# EAGLE board lv2-2m (EAGLE 4.09)
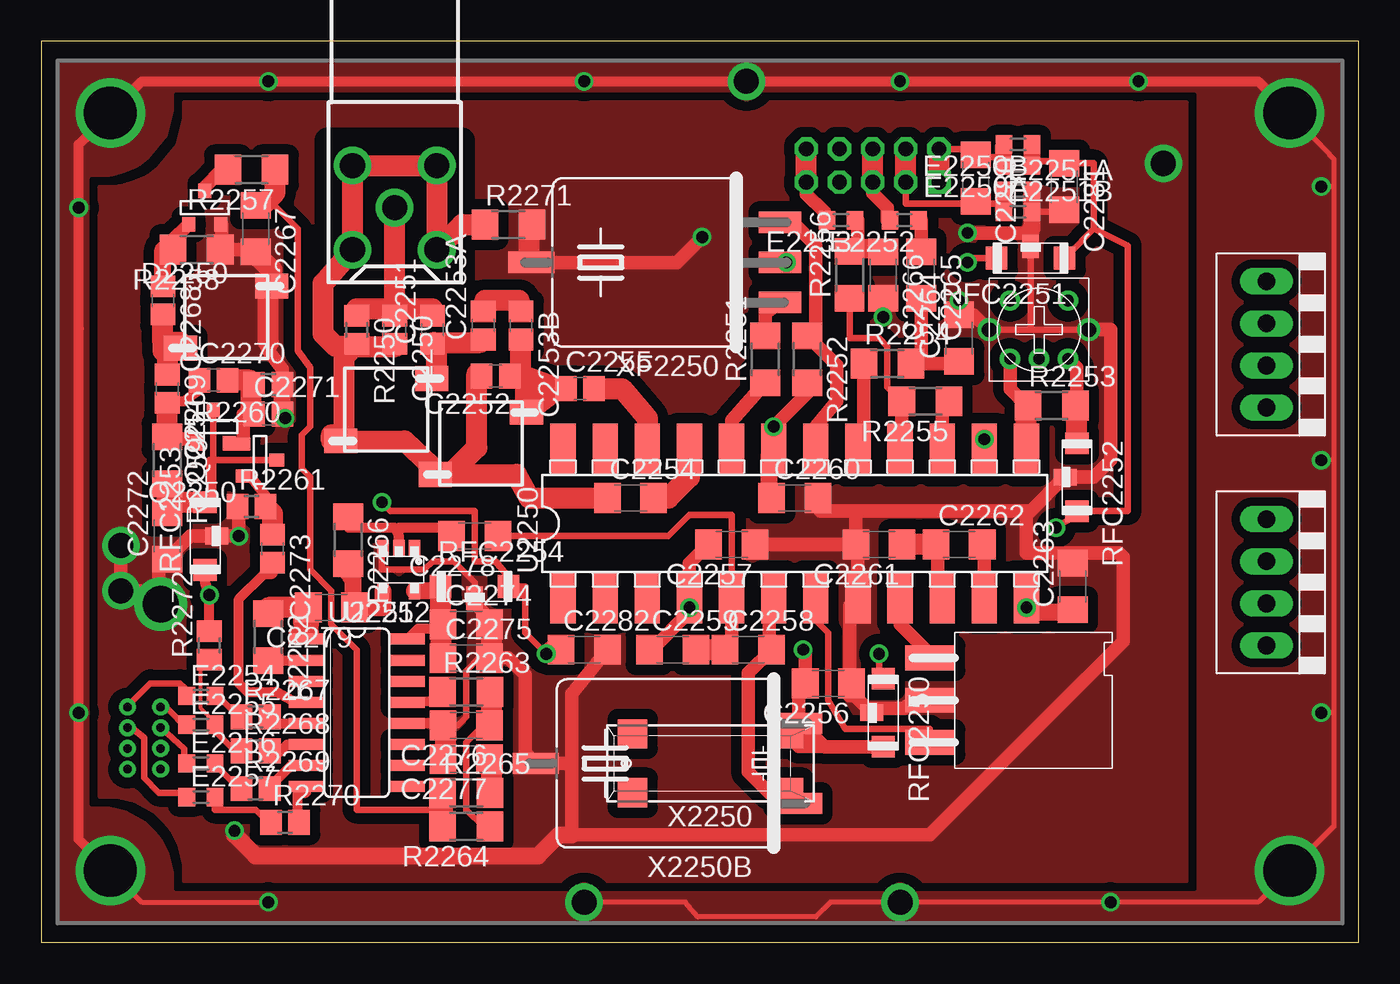
[diagram p0: board, top side]
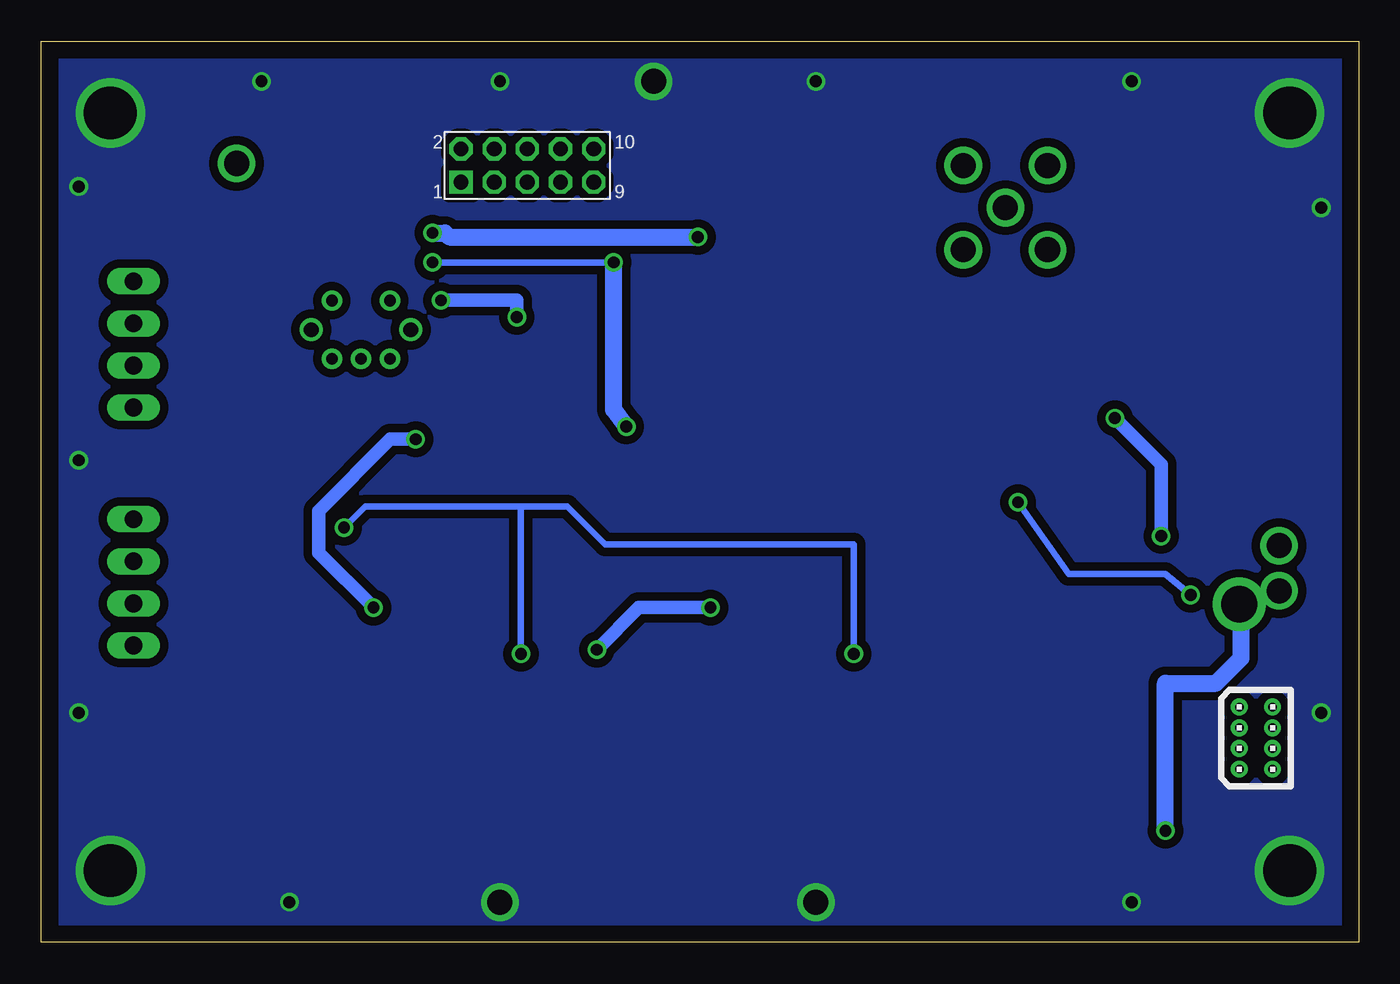
[diagram p1: board, bottom side, seen from below]

Size 79.43 x 54.35 mm. Coordinates in mm from the lower left corner, seen from the top.
Outline: 0,0 79.43,0 79.43,54.35 0,54.35 0,0
Copper layers used: Top, Bottom
tRestrict: 3 lines

## Footprints (pad centres in the part's own frame; a part is rotated, then mirrored left to right if it is on the bottom)
C0805 = smd 1.3 x 1.5: 1 -0.85,0; 2 0.85,0
C1206 = smd 1.6 x 1.8: 1 -1.4,0; 2 1.4,0
PHEONIX-2.54-PITCH-EUROBLOCK = drill 1.067 long: 1 0,3.81; 2 0,1.27; 3 0,-1.27; 4 0,-3.81
2MM-2X5-HEADER = drill 0.889 pad 1.321 square: 1 -4,-1 | drill 0.889 pad 1.321 octagon: 2 -4,1; 3 -2,-1; 4 -2,1; 5 0,-1; 6 0,1; 7 2,-1; 8 2,1; 9 4,-1; 10 4,1
FARKA_MALE_PCB = drill 1.511 round: RF+ 0,0; RF-@1 2.54,2.54; RF-@2 -2.54,2.54; RF-@3 -2.54,-2.54; RF-@4 2.54,-2.54
JST-08P-JED = drill 0.508 pad 1.016 round: 1 -1.875,1; 2 -1.875,-1; 3 -0.625,1; 4 -0.625,-1; 5 0.625,1; 6 0.625,-1; 7 1.875,1; 8 1.875,-1
SOT-23 = smd 0.787 x 0.889: 1 0.025,-1.016; 2 -0.94,1.016; 3 0.991,1.016
R0603 = smd 1 x 1.1: 1 -0.85,0; 2 0.85,0
TOKO_MC152_UNSHLD = smd 1.5 x 2: 1 -1.875,2.75; 2 1.875,-2.75
TOKO_5P_CAN = drill 0.711 round: 1 -1.75,-1.75; 2 -1.75,0; 3 -1.75,1.75; 4 1.75,1.75; 6 1.75,-1.75 | drill 0.889 round: SHIELD@1 0,3; SHIELD@2 0,-3
R0805 = smd 1.3 x 1.5: 1 -0.85,0; 2 0.85,0
R1206 = smd 1.6 x 1.803: 1 -1.422,0; 2 1.422,0
EXC-CET = smd 1.3 x 1.4: 1 -2.05,0; 2 2.05,0 | smd 1 x 1.4: C 0,-0.7
DIL24-SMT = smd 1.524 x 3.175: 1 -13.97,-4.445; 2 -11.43,-4.445; 3 -8.89,-4.445; 4 -6.35,-4.445; 5 -3.81,-4.445; 6 -1.27,-4.445; 7 1.27,-4.445; 8 3.81,-4.445; 9 6.35,-4.445; 10 8.89,-4.445; 11 11.43,-4.445; 12 13.97,-4.445; 13 13.97,4.445; 14 11.43,4.445; 15 8.89,4.445; 16 6.35,4.445; 17 3.81,4.445; 18 1.27,4.445; 19 -1.27,4.445; 20 -3.81,4.445; 21 -6.35,4.445; 22 -8.89,4.445; 23 -11.43,4.445; 24 -13.97,4.445
SO16 = smd 0.66 x 2.032: 1 -4.445,-3.073; 2 -3.175,-3.073; 3 -1.905,-3.073; 4 -0.635,-3.073; 5 0.635,-3.073; 6 1.905,-3.073; 7 3.175,-3.073; 8 4.445,-3.073; 9 4.445,3.073; 10 3.175,3.073; 11 1.905,3.073; 12 0.635,3.073; 13 -0.635,3.073; 14 -1.905,3.073; 15 -3.175,3.073; 16 -4.445,3.073
SOT23-5 = smd 0.7 x 1: 1 -0.95,-1.3; 2 0,-1.3; 3 0.95,-1.3; 4 0.95,1.3; 5 -0.95,1.3
MM39SL = smd 1.778 x 1.778: 1 -4.699,-1.778; 2 4.699,-1.778; 3 4.699,1.778; 4 -4.699,1.778
HC49GW = smd 1.27 x 2.54: 1 -2.413,-8.001; 2 2.413,-8.001 | smd 1.27 x 2.794: 3 0,8.001
HC49U-SMT = smd 1.27 x 2.54: 1 -2.413,-8.001; 2 2.413,-8.001; 3 0,-8.001 | smd 1.27 x 2.794: 4 0,7.001
CERAMIC_FILTER_SIDEWAYS_SMT = smd 1.5 x 3: 1 -2.54,-1.5; 2 0,-1.5; 3 2.54,-1.5

## Placement (x,y rotation side)
C2250  82pF  [C0805]  21.3,36.95 270 top
C2251  27pF  [C0805]  23.58,36.95 90 top
C2252  15pF  [C0805]  27.39,34.16 180 top
C2253A  5pF  [C0805]  26.63,37.21 90 top
C2253B  2pF  [C0805]  28.92,37.21 270 top
C2254  0.1  [C1206]  35.52,26.79 0 top
C2255  100pF  [C0805]  32.47,33.4 0 top
C2256  10  [C1206]  47.46,15.62 180 top
C2257  0.1  [C1206]  41.62,24 180 top
C2258  51pF  [C1206]  42.63,17.65 0 top
C2259  120pF  [C1206]  38.06,17.65 0 top
C2260  0.1  [C1206]  45.43,26.79 0 top
C2261  0.1  [C1206]  50.51,24 180 top
C2262  0.1  [C1206]  55.33,24 0 top
C2263  0.1  [C1206]  62.19,21.46 90 top
C2264  0.1  [C1206]  55.33,36.44 90 top
C2265  0.33  [C1206]  53.05,40.25 270 top
C2266  0.1  [C1206]  50.76,40.25 270 top
C2267  0.047  [C1206]  12.92,43.05 270 top
C2268  18pF  [C0805]  7.33,38.73 270 top
C2269  100pF  [C0805]  7.58,33.4 270 top
C2270  20pF  [C0805]  10.38,33.9 0 top
C2271  10pF  [C0805]  13.68,31.87 0 top
C2272  0.1  [C1206]  7.58,24.51 90 top
C2273  100pF  [C0805]  13.93,23.74 270 top
C2274  10  [C1206]  25.62,19.17 0 top
C2275  0.1  [C1206]  25.62,17.14 0 top
C2276  0.047  [C1206]  25.62,13.08 180 top
C2277  0.33  [C1206]  25.62,11.04 180 top
C2278  0.01  [C1206]  26.12,24.51 180 top
C2279  0.01  [C1206]  17.49,20.19 180 top
C2280  0.1  [C1206]  56.35,46.1 270 top
C2281  0.1  [C1206]  61.68,45.59 270 top
C2282  0.1  [C1206]  32.73,17.65 0 top
CF2100  CONN_EUROBLOCK_PHEONIX2.54  [PHEONIX-2.54-PITCH-EUROBLOCK]  73.88,36.06 180 top
CF2101  CONN_EUROBLOCK_PHEONIX2.54  [PHEONIX-2.54-PITCH-EUROBLOCK]  73.88,21.71 180 top
CF2251  2mm-2x5 receptacle  [2MM-2X5-HEADER]  50.13,46.86 0 bottom
CM2250  CONN_SMB_MALE-FARKA  [FARKA_MALE_PCB]  21.3,44.32 90 top
CM2251  Digital Control  [JST-08P-JED]  6.18,12.31 90 bottom
D2250  ZDC833A  [SOT-23]  9.87,44.32 180 top
E2250A  [R0603]  58.89,46.86 180 top
E2250B  [R0603]  58.89,48.13 180 top
E2251A  [R0603]  58.89,45.33 0 top
E2251B  [R0603]  58.89,44.06 0 top
E2252  [R0603]  52.03,43.56 180 top
E2253  [R0603]  48.22,43.56 180 top
E2254  [R0603]  9.61,14.85 0 top
E2255  [R0603]  9.61,13.13 0 top
E2256  [R0603]  9.61,10.79 0 top
E2257  [R0603]  9.61,8.76 0 top
LV2250  36-46nH  [TOKO_MC152_UNSHLD]  20.79,32.13 270 top
LV2251  36-46nH  [TOKO_MC152_UNSHLD]  26.51,30.09 270 top
LV2252  455kHz  [TOKO_5P_CAN]  60.16,36.95 90 top
LV2253  32nH  [TOKO_MC152_UNSHLD]  11.14,37.71 90 top
Q2250  H10  [SOT-23]  10.38,31.11 180 top
Q2251  H10  [SOT-23]  13.17,29.08 90 top
R2250  1k  [R0805]  19.01,36.95 270 top
R2251  1k  [R1206]  43.65,35.17 90 top
R2252  1.8k  [R1206]  46.19,35.17 270 top
R2253  47k  [R1206]  60.92,32.38 0 top
R2254  1k  [R1206]  51.02,34.92 0 top
R2255  0  [R1206]  53.3,32.63 180 top
R2256  4.7k  [R1206]  48.73,40.25 90 top
R2257  20k  [R1206]  12.66,46.6 180 top
R2258  10k  [R1206]  9.36,41.78 180 top
R2259  20k  [R1206]  7.58,29.08 270 top
R2260  470  [R0805]  13.68,33.65 180 top
R2261  680  [R0805]  12.66,26.28 0 top
R2262  4.7M  [R1206]  13.68,18.41 270 top
R2263  2k  [R1206]  25.62,15.11 0 top
R2264  2k  [R1206]  25.62,6.98 180 top
R2265  10k  [R1206]  25.62,9.01 0 top
R2266  1M  [R1206]  18.5,24.25 270 top
R2267  1k  [R0805]  12.92,13.58 0 top
R2268  1k  [R0805]  12.92,11.55 0 top
R2269  1k  [R0805]  12.92,9.27 0 top
R2270  100  [R0805]  14.69,7.23 0 top
R2271  1k  [R1206]  28.16,43.3 0 top
R2272  47k  [R0805]  10.12,17.9 90 top
RFC2250  [EXC-CET]  50.76,13.84 270 top
RFC2251  [EXC-CET]  59.65,41.27 180 top
RFC2252  [EXC-CET]  62.45,28.06 270 top
RFC2253  [EXC-CET]  9.87,24.51 90 top
RFC2254  [EXC-CET]  26.12,21.46 0 top
U2250  [DIL24-SMT]  45.43,25.27 0 top
U2251  [SO16]  19.01,13.84 270 top
U2252  74HC1G04  [SOT23-5]  21.55,22.47 180 top
X2250  10.240MHz  [MM39SL]  40.35,10.79 180 top
X2250B  [HC49GW]  37.81,10.79 90 top
XF2250  10.7MHz  [HC49U-SMT]  36.54,41.02 90 top
XF2251  455kHz  [CERAMIC_FILTER_SIDEWAYS_SMT]  55.08,14.6 270 top

## Library data of the parts
C2250-C2252 C2253A C2253B C2254-C2282 R2250-R2272 = rcl
CF2100 CF2101 CF2251 CM2250 CM2251 E2250A E2250B E2251A E2251B E2252-E2257 LV2250-LV2253 RFC2250-RFC2254 U2250-U2252 XF2250 XF2251 = psas_eagle_library
D2250 = zetex
Q2250 Q2251 = custom-zetex
X2250 X2250B = crystal

## Nets
5VOLTS: C2281.1 C2282.1 E2250A.1 E2250B.1 R2272.2 RFC2250.1 RFC2251.1 RFC2252.2 RFC2253.1 RFC2254.2
AF_OUT: R2254.1 U2250.17
AUDIO_AC: C2265.1 E2252.1
AUDIO_FILT: C2264.1 C2265.2 R2254.2
AUDIO_OUTPUT: CF2251.5 CF2251.6 E2252.2
BPF1_IN: R2251.2 XF2250.1
BPF1_OUT: R2252.1 U2250.18 XF2250.2
BYP_1: C2261.1 C2262.1 U2250.10
BYP_2: C2262.2 U2250.11
C2253W: C2253A.2 C2253B.1
CLOCK: CM2251.5 E2256.1
CLOLCK_FB: E2257.2 R2270.1
COMMON_K: D2250.1 R2257.2
DATA_IN: CM2251.8 E2254.1
DATA_IN_FB: E2254.2 R2267.1
DATA_OUT: CM2251.6 E2257.1
DATA_OUT_FB: E2256.2 R2269.1
DEMOD: LV2252.3 R2253.1 U2250.13
ENABLE\: CM2251.7 E2255.1
ENABLE\_FB: E2255.2 R2268.1 R2272.1
GND: C2256.1 C2257.1 C2260.2 C2261.2 C2263.2 C2264.2 C2266.2 C2267.2 C2271.2 C2272.1 C2274.2 C2275.2 C2276.2 C2277.2 C2281.2 C2282.2 D2250.2 E2251A.2 E2251B.2 LV2252.SHIELD@1 LV2252.SHIELD@2 LV2253.2 R2258.1 R2260.1 R2261.1 R2271.2 RFC2250.C RFC2251.C RFC2252.C RFC2253.C RFC2254.C U2250.8 U2251.12 U2252.3 X2250B.3 XF2250.4 XF2251.2
IF_IN: U2250.9 XF2251.1
INVERTER_IN: C2278.2 R2266.1 U2252.2
INVERTER_OUT: C2279.1 R2266.2 U2252.4
LO1_IN: C2258.2 U2250.6 X2250.4 X2250B.1
LO1_OUT: C2258.1 C2259.2 C2278.1 U2250.5
MX1_I1: C2255.2 U2250.22
MX1_I2: C2254.2 U2250.21
MX1_OUT: R2251.1 U2250.20
MX2_OUT: U2250.7 XF2251.3
NEG_IN: C2280.2 CF2251.3 CF2251.4 E2251A.1 E2251B.1
OPAMP_FEEDBACK: R2255.1 U2250.15
OPAMP_OUTPUT: R2255.2 R2256.1 U2250.16
PHI-A: R2263.1 U2251.13
PLL_CLOCK: R2269.2 U2251.7
PLL_DATA_IN: R2267.2 U2251.5
PLL_DATA_OUT: R2270.2 U2251.8
PLL_ENB\: R2268.2 U2251.6
PLL_FILT1: C2276.1 R2263.2 R2264.1
PLL_FILT2: C2277.1 R2265.2
PLL_OSC_IN: C2279.2 R2262.1 U2251.1
PLL_OSC_OUT: R2262.2 U2251.2
PLL_RF_IN: C2273.2 U2251.4
POS_IN: C2280.1 CF2251.1 CF2251.2 E2250A.2 E2250B.2
Q2250_B: C2269.2 C2270.1 Q2250.3 R2259.1
Q2250_E: C2270.2 C2271.1 Q2250.2 Q2251.3 R2260.2
Q2251_E: C2273.1 Q2251.2 R2261.2
RF+: C2250.1 C2251.2 CM2250.RF+ R2250.1
RF-: C2250.2 C2252.2 C2254.1 CM2250.RF-@1 CM2250.RF-@2 CM2250.RF-@3 CM2250.RF-@4 LV2250.2 LV2251.2 R2250.2 R2271.1
RSSI: CF2251.9 CF2251.10 E2253.2
RSSI_FILT: C2266.1 E2253.1 R2256.2
RSSI_RAW: C2263.1 U2250.12 U2250.14
T1: C2251.1 C2253A.1 LV2250.1
T2: C2252.1 C2253B.2 C2255.1 LV2251.1
T3: C2268.2 C2269.1 LV2253.1
TUNING_VOLTAGE: C2267.1 R2257.1 R2264.2 R2265.1
VARICAP_ANODE: C2268.1 D2250.3 R2258.2
VCC_1: C2256.2 C2257.2 C2259.1 RFC2250.2 U2250.4 X2250.1 X2250B.2
VCC_2: C2260.1 R2252.2 RFC2251.2 U2250.19 XF2250.3
VCC_3: LV2252.1 R2253.2 RFC2252.1
VCC_4: C2272.2 Q2250.1 Q2251.1 R2259.2 RFC2253.2
VCC_5: C2274.1 C2275.1 RFC2254.1 U2251.16 U2252.5

## Tracks (layer width: path | path; a pad name or v marks a point on that pad's centre or on a via)
5VOLTS  (via drill 0.71)
  Top 0.406: E2250A.1 59.74,47.11 61.68,47.11 C2281.1 63.46,46.99 63.46,43.05 | 61.68,41.52 RFC2251.1 61.94,41.52 63.46,43.05 | 63.46,43.05 65.49,42.03 65.49,26.01 RFC2252.2 62.45,25.78 v61.18,25.01 | 28.68,21.46 28.66,21.46 | 28.68,21.46 RFC2254.2 28.41,21.71 27.39,22.98 26.12,22.98 26.12,26.03 21.04,26.03 v20.54,26.54 | 29.17,21.46 29.17,18.66 v30.44,17.39 | 28.68,21.46 29.17,21.46 | 28.92,20.95 28.92,21.2 29.17,21.46 | RFC2253.1 9.87,22.47 | RFC2250.1 50.51,16.14 v50.51,17.39
  Top 0.61: RFC2253.1 9.87,21.71 v10.12,20.95 R2272.2
  Top 1.016: E2250A.1 E2250B.1 | v30.44,17.39 30.7,17.65 C2282.1
  Bottom 0.406: 50.51,26.28 47.71,26.28 45.43,24 30.44,24 v30.44,17.39 | 50.51,26.28 59.91,26.28 v61.18,25.01 | v20.54,26.54 17.49,22.22 11.65,22.22 v10.12,20.95 | 50.51,26.28 v50.51,17.39
AF_OUT
  Top 0.813: U2250.17 49.24,29.84 49.59,30.2 R2254.1
AUDIO_AC
  Top 0.813: 52.79,43.56 E2252.1 53.05,43.56 C2265.1
AUDIO_FILT
  Top 0.813: C2264.1 55.21,34.92 R2254.2 52.44,35.17 | 52.44,35.17 52.29,35.17 | C2265.2 53.05,35.17 52.44,35.17
AUDIO_OUTPUT
  Top 0.813: 50.13,45.84 50.13,45.21 51.02,44.32 51.02,43.56 E2252.2
  Top 1.27: CF2251.5 50.13,45.84 CF2251.6
BPF1_IN
  Top 0.813: XF2250.1 43.65,37.97 R2251.2
BPF1_OUT
  Top 0.813: XF2250.2 45.3,43.43 46.7,42.03 46.7,36.95 46.44,36.7 R2252.1 47.97,34.82 47.97,32.63 46.7,31.11 U2250.18 46.7,29.59
BYP_1
  Top 0.813: C2262.1 54.06,24 54.06,20.82 U2250.10
  Top 1.27: C2262.1 C2261.1
BYP_2
  Top 0.813: C2262.2 56.86,24 U2250.11
C2253W
  Top 1.27: C2253B.1 28.79,38.73 26.76,38.73 C2253A.2
CHASSIS  (via drill 0.71, 1.51, 3.17)
  Top 0.305: 77.94,45.59 77.94,47.24 v75.27,50.03 | 77.94,45.59 77.94,29.08 | 77.94,29.08 77.94,13.84 | 77.94,13.84 77.94,6.98 v75.27,4.31 73.37,2.41 v64.48,2.41 v51.78,2.41 | v51.78,2.41 51.65,2.41 | v51.78,2.41 47.59,2.41 46.7,1.52 39.59,1.52 38.82,2.41 v32.73,2.41 | v4.15,4.31 6.06,2.41 v13.68,2.41 | 77.94,13.84 v77.18,13.84 | 77.94,29.08 v77.18,29.08 | 77.94,45.59 v77.18,45.59
  Top 0.61: v4.15,4.31 2.25,6.22 v2.25,13.84 2.25,37.08 | 2.25,37.08 v2.25,44.32 2.25,48.13 v4.15,50.03 6.06,51.94 v13.68,51.94 v32.73,51.94 v42.51,51.94 v51.78,51.94 v66.15,51.94 73.37,51.94 v75.27,50.03 | 2.25,37.08 2.25,36.95
  pour Top (isolate 0.508, rank 2, no thermals): 0.98,1.14 0.98,53.21 78.45,53.21 78.45,1.14
  pour Bottom (isolate 0.508, rank 2): 0.98,1.14 0.98,53.21 78.45,53.21 78.45,1.14
CLOCK
  Top 0.406: CM2251.5 7.21,12.94 8.6,11.65 8.6,10.79 E2256.1
CLOLCK_FB
  Top 0.406: E2257.2 10.46,8 12.92,8 13.68,7.23 R2270.1
COMMON_K
  Top 0.813: R2257.2 10.88,46.6 9.84,45.56 D2250.1
DATA_IN
  Top 0.406: CM2251.8 5.18,14.23 6.57,15.62 8.34,15.62 8.6,15.36 8.6,14.85 E2254.1
DATA_IN_FB
  Top 0.406: E2254.2 10.63,14.85 12.07,13.42 R2267.1
DATA_OUT
  Top 0.406: CM2251.6 5.43,12.94 6.18,12.31 6.18,9.9 7.07,9.01 8.51,9.01 E2257.1
DATA_OUT_FB
  Top 0.406: R2269.1 11.9,9.27 10.38,10.79 E2256.2
DEMOD
  Top 0.813: R2253.1 59.4,32.38 58.41,33.37 LV2252.3
  Top 1.27: R2253.1 59.4,32.28 U2250.13
ENABLE\
  Top 0.406: CM2251.7 7.48,14.19 8.85,12.82 E2255.1
ENABLE\_FB
  Top 0.254: 9.61,16.54 9.61,14.09 10.38,13.33
  Top 0.305: 9.61,16.54 R2272.1 | 10.38,13.33 10.38,13.08 E2255.2 10.63,13.08
  Top 0.406: R2268.1 11.9,11.3 10.38,12.82 10.46,12.91 E2255.2
GND  (via drill 0.71, 1.51, 2.18)
  Top 0.406: C2281.2 61.68,44.06 E2251B.2 | RFC2254.C 26.12,21.71 24.85,22.98 23.58,22.98 23.08,22.47 20.54,22.47 20.54,23.77 U2252.3 | 59.65,36.95 RFC2251.C | 59.65,36.95 LV2252.SHIELD@2 63.21,36.95 | 59.65,36.95 LV2252.SHIELD@1 | 24.35,13.08 25.11,13.08 25.62,13.58 25.62,16.38 26.38,17.14 26.89,17.14 C2275.2 27.14,17.14 | RFC2250.C 50,13.9 50,14.09 | 50.76,38.98 C2266.2 50.76,38.73
  Top 0.61: C2276.2 24.09,13.08 24.09,13.2 U2251.12
  Top 0.813: LV2252.SHIELD@2 64.48,36.95 64.48,29.08 63.46,28.06 RFC2252.C 61.68,28.06 59.65,26.03 58.89,26.03 | 62.19,23.49 59.4,23.49 59.4,25.65 59.02,26.03 58.89,26.03 | 62.19,23.49 C2263.2 | 49.11,26.03 C2261.2 | 58.89,26.03 49.11,26.03 | C2260.2 46.95,26.79 46.95,26.03 49.11,26.03 | C2261.2 49.24,24 U2250.8 48.73,20.31 48.73,15.62 | 42.89,24 C2257.1 C2261.2 | v55.33,38.73 C2264.2 56.22,37.84 57.11,36.95 LV2252.SHIELD@1 | v50.76,37.71 50.76,38.73 | 62.19,23.49 64.99,23.49 65.24,23.24 65.24,18.16 53.56,6.47 31.97,6.47 31.97,10.79 | 48.73,15.62 C2256.1 | RFC2250.C 49.05,14.85 48.73,14.85 48.73,15.62 | XF2251.2 52.54,14.6 52.03,14.09 50,14.09 | C2282.2 31.97,14.98 31.97,10.79 | 31.97,10.79 X2250B.3 29.17,11.43 29.17,16.12 28.16,17.14 26.89,17.14 | RFC2254.C 26.12,20.44 26.89,19.68 26.89,19.17 C2274.2 | D2250.2 10.88,43.3 10.88,41.78 | 10.88,41.78 R2258.1 | C2267.2 12.92,41.78 10.88,41.78 | R2260.1 14.53,34.58 13.68,35.68 13.68,35.94 | C2271.2 14.53,31.62 v14.69,31.62 | 10.88,24.51 10.63,24.51 | 10.88,24.51 v11.9,24.51 11.9,26.2 R2261.1 | v4.79,23.92 v4.79,21.2 6.39,21.2 7.07,20.52 | 7.07,22.6 C2272.1 8.98,24.51 10.88,24.51 | 10.88,24.51 RFC2253.C | 59.65,42.79 v55.84,42.79 | v39.84,42.54 38.32,41.02 XF2250.4 | v7.2,20.39 7.07,20.52 | 7.07,22.6 7.07,22.73 | 7.07,20.52 7.07,22.6
  Top 1.016: E2251A.2 E2251B.2 59.74,43.05 59.65,43.05 59.65,42.79 RFC2251.C | C2271.2 R2260.1 14.44,33.65 | 13.68,35.94 13.68,36.19 | v11.65,6.73 11.65,6.47 12.92,5.2 29.93,5.2 31.2,6.47 31.97,6.47
  Top 1.27: C2277.2 24.35,11.04 24.35,13.08 C2276.2 | C2274.2 27.14,19.05 27.14,17.14 | C2267.2 12.92,41.52 13.89,40.55 LV2253.2 13.68,39.63 13.68,36.19 | XF2250.4 29.43,41.02 29.43,43.15 R2271.2
  Bottom 0.406: v7.2,20.39 7.07,20.26 7.07,19.17
  Bottom 0.813: v55.33,38.73 50.76,38.73 v50.76,37.71 | v14.69,31.62 11.9,28.82 v11.9,24.51
  Bottom 1.016: v11.65,6.73 11.65,15.62 8.6,15.62 7.07,17.14 7.07,19.17 7.07,19.25 | v39.84,42.54 54.83,42.54 55.08,42.79 v55.84,42.79
  other vias: 67.65,46.98
  pour Top (isolate 0.635, no thermals): 3.52,8.76 3.52,45.59 4.66,45.59 5.55,45.84 6.44,46.22 7.07,46.73 8.22,48.13 8.6,49.65 8.6,50.67 69.05,50.67 69.05,3.68 8.6,3.68 8.6,4.69 8.34,5.84 7.96,6.6 7.58,7.11 6.82,7.87 5.68,8.5 4.53,8.76
IF_IN
  Top 0.813: U2250.9 51.78,19.17 53.56,17.39 53.56,17.14 XF2251.1
INVERTER_IN
  Top 0.61: R2266.1 18.5,25.01 21.3,25.01 21.55,24.51 U2252.2 21.55,25.01 24.6,25.01 24.6,24.51 C2278.2
INVERTER_OUT
  Top 1.016: R2266.2 18.5,22.22 18.76,21.97 18.76,20.19 C2279.1 20.6,20.19 U2252.4
LO1_IN
  Top 0.813: X2250B.1 45.17,9.01 X2250.4 43.9,9.01 42.63,10.28 42.63,16.25 C2258.2 43.9,17.65 43.9,20.57 U2250.6
LO1_OUT
  Top 0.406: U2250.5 41.62,25.78 39.08,25.78 37.81,24.51 C2278.1
  Top 0.813: 41.11,17.65 C2258.1 41.62,17.65 U2250.5
  Top 1.27: C2258.1 C2259.2
MX1_I1
  Top 1.27: U2250.22 36.54,31.62 35.01,33.4 C2255.2
MX1_I2
  Top 1.27: U2250.21 39.08,28.06 37.81,26.79 C2254.2
MX1_OUT
  Top 0.813: R2251.1 41.62,31.47 U2250.20
MX2_OUT
  Top 0.406: XF2251.3 53.58,12.87 48.48,12.87 47.46,14.6 47.46,18.66 46.7,19.43 U2250.7
NEG_IN
  Top 0.406: 56.35,44.57 C2280.2 | 52.13,45.84 52.13,44.57 56.35,44.57 | E2251B.1 58.04,44.57 56.35,44.57
  Top 1.016: E2251B.1 E2251A.1
  Top 1.27: 52.13,45.84 CF2251.3 CF2251.4
OPAMP_FEEDBACK
  Top 0.813: R2255.1 54.32,32.23 U2250.15
OPAMP_OUTPUT
  Top 0.406: R2255.2 51.02,33.5 51.02,35.94 50.51,36.44 48.73,36.44 R2256.1 48.73,38.98
  Top 0.813: U2250.16 51.78,29.84 51.88,29.94 R2255.2
PHI-A
  Top 0.61: U2251.13 22.82,14.47 22.85,14.5 23.58,14.6 24.09,15.11 R2263.1
PLL_CLOCK
  Top 0.61: U2251.7 15.07,10.66 13.68,9.27 R2269.2
PLL_DATA_IN
  Top 0.61: R2267.2 13.68,13.33 13.8,13.2 U2251.5
PLL_DATA_OUT
  Top 0.61: U2251.8 15.94,9.01 15.46,9.01 15.46,7.23 R2270.2
PLL_ENB\
  Top 0.61: U2251.6 14.82,11.93 14.19,11.3 R2268.2 13.68,11.3
PLL_FILT1
  Top 0.406: C2276.1 26.63,13.08 25.62,12.06 25.62,8 26.63,6.98 R2264.1 27.14,6.98
  Top 1.27: R2263.2 27.14,15.11 27.14,13.2 C2276.1
PLL_FILT2
  Top 1.27: C2277.1 27.14,11.04 27.14,9.11 R2265.2
PLL_OSC_IN
  Top 0.61: U2251.1 15.94,18.66 | 15.94,18.66 15.2,18.66 | 15.94,18.66 16.22,18.66
  Top 1.016: 16.22,18.66 16.22,19.17 15.71,19.17 15.71,20.19 15.96,20.19
  Top 1.27: 13.68,19.68 R2262.1 13.68,20.19 15.96,20.19 C2279.2
PLL_OSC_OUT
  Top 0.61: 13.68,16.89 R2262.2 13.68,17.01 U2251.2
PLL_RF_IN
  Top 0.61: U2251.4 15.33,14.47 14.19,15.11 12.41,15.11 11.9,15.62 11.9,20.7 13.42,22.22 13.93,22.22 C2273.2
POS_IN
  Top 0.406: CF2251.2 56.35,47.86 C2280.1 56.35,47.37 58.04,47.37 E2250A.2 | 57.87,48.13 E2250B.2 58.13,48.13
  Top 1.016: E2250A.2 E2250B.2
  Top 1.27: 54.08,45.86 54.06,45.84 | CF2251.1 54.08,45.86 | CF2251.2 54.13,45.91 54.08,45.86
Q2250_B
  Top 0.61: 7.58,32.38 C2269.2 7.58,32.63 8.6,32.63 9.53,33.31 C2270.1
  Top 0.813: R2259.1 7.58,30.35 9.13,30.35 Q2250.3
  Top 1.27: R2259.1 7.58,32.38
Q2250_E
  Top 0.406: 12.15,30.09 Q2251.3
  Top 0.813: 12.15,30.09 12.15,30.35 | 12.92,31.87 C2271.1 12.15,31.87 12.15,30.09 | Q2250.2 12.15,30.09
  Top 1.27: C2270.2 12.57,33.9 R2260.2 12.66,33.48 12.66,32.04 C2271.1
Q2251_E
  Top 0.61: Q2251.2 12.59,28.14 13.51,26.96 R2261.2
  Top 1.27: R2261.2 13.93,25.86 C2273.1
RF+
  Top 1.27: C2251.2 23.58,38.22 21.3,38.22 | R2250.1 19.01,38.22 21.3,38.22 | 21.3,38.22 C2250.1 | 21.3,38.22 CM2250.RF+
RF-
  Top 1.27: CM2250.RF-@2 18.76,41.52 | CM2250.RF-@2 CM2250.RF-@1 CM2250.RF-@4 CM2250.RF-@3 25.36,43.3 R2271.1 | CM2250.RF-@2 16.98,39.75 16.98,36.7 17.74,35.94 18.85,35.94 R2250.2 | 18.25,34.41 18.25,30.6 17.49,30.6 17.49,30.25 LV2250.2 21.9,30.25 23.96,28.32 | 23.96,28.32 23.87,28.22 LV2251.2 28.63,28.22 29.43,26.79 C2254.1 | C2252.2 26.25,34.28 26.25,29.84 24.73,28.32 23.96,28.32 | 18.25,34.41 18.25,34.51 | R2250.2 18.25,35.34 18.25,34.41 | R2250.2 19.01,35.94 21.39,35.94 C2250.2
RSSI
  Top 0.406: 46.19,47.87 46.14,47.87 CF2251.10
  Top 0.813: CF2251.9 46.13,45.14 47.21,44.06 47.21,43.56 E2253.2
  Top 1.27: CF2251.9 CF2251.10 46.13,47.87 46.19,47.87
RSSI_FILT
  Top 0.813: C2266.1 50.76,41.78 48.73,41.78 R2256.2 49.75,41.68 49.75,42.03 49.24,42.03 49.24,43.56 E2253.1
RSSI_RAW  (via drill 0.71)
  Top 0.406: 56.86,29.84 56.86,29.59
  Top 0.813: U2250.12 v59.4,20.19 | v56.86,30.35 56.86,29.84 U2250.14 56.86,29.59
  Top 1.016: C2263.1 62.19,19.93 59.65,19.93 v59.4,20.19
  Bottom 0.813: v59.4,20.19 62.7,23.49 62.7,26.03 58.38,30.35 v56.86,30.35
T1
  Top 1.27: LV2250.1 23.84,34.3 23.84,35.85 C2251.1 23.67,36.19 26.47,36.19 C2253A.1
T2
  Top 1.27: 28.92,34.16 C2253B.2 | LV2251.1 30.81,33.14 C2255.1 | C2255.1 31.2,33.4 29.17,34.16 28.92,34.16 | C2252.1 28.92,34.16 | C2255.1 29.17,33.65 29.17,32.13
T3
  Top 1.27: 7.33,36.19 C2268.2 | C2269.1 7.58,35.68 7.33,35.68 7.33,36.19 | LV2253.1 8.39,36.19 7.33,36.19
TUNING_VOLTAGE
  Top 0.406: R2265.1 24.19,8 19.01,8 19.01,17.65 17.49,19.17 17.49,21.2 16.22,22.47 16.22,28.06 15.71,28.57 15.71,30.6 16.22,31.11 16.22,34.67 15.46,35.68 15.46,43.05 14.06,44.45 C2267.1 12.92,44.57
  Top 1.27: R2257.1 14.08,45.23 13.42,44.57 12.92,44.57 | 24.09,8.1 24.09,8.25 | 24.19,8 24.09,8.1 | R2264.2 24.09,7.08 24.09,8.1
VARICAP_ANODE
  Top 0.813: D2250.3 8.85,43.3 7.84,42.29 7.84,41.78
  Top 1.016: R2258.2 7.84,41.78 7.33,41.78 C2268.1
VCC_1  (via drill 0.71)
  Top 0.813: RFC2250.2 47.22,11.79 X2250B.2 | X2250B.2 45.81,12.95 46.95,11.81 45.68,11.81 44.92,12.57 X2250.1 45.17,12.57 | C2259.1 36.79,17.65 39.08,19.93 v39.08,20.19 U2250.4 39.08,22.86 C2257.2 | v45.94,17.65 46.06,17.52 C2256.2 45.68,15.24 45.68,13.33 X2250B.2
  Bottom 0.813: v45.94,17.65 43.4,20.19 v39.08,20.19
VCC_2  (via drill 0.71)
  Top 0.406: RFC2251.2 56.1,41.27 v55.84,41.02 | v44.92,41.02 XF2250.3
  Top 0.813: v44.16,31.11 46.44,33.4 R2252.2
  Top 1.016: v44.16,31.11 U2250.19 43.9,29.46 43.9,26.79 C2260.1
  Bottom 0.406: v44.92,41.02 v55.84,41.02
  Bottom 1.016: v44.16,31.11 44.92,32.13 v44.92,41.02
VCC_3
  Top 0.813: 62.45,32.13 62.45,32.28 | 62.45,32.28 R2253.2 62.45,32.38 | LV2252.1 62.45,34.67 62.45,32.38 | 62.45,32.28 62.45,32.38
  Top 1.27: 62.45,32.38 62.45,32.13 RFC2252.1
VCC_4
  Top 0.305: 14.19,29.08 Q2251.1
  Top 0.406: RFC2253.2 9.87,26.54 10.35,26.77 | 10.35,26.77 Q2250.1 | 14.19,29.08 10.12,29.08 10.12,26.79 10.35,26.77
  Top 1.27: 7.58,25.78 C2272.2 7.58,26.03 | 7.58,26.03 R2259.2 | RFC2253.2 8.11,26.56 7.58,26.03
VCC_5
  Top 0.61: U2251.16 22.72,18.92 24.09,18.92 24.09,19.17 C2274.1
  Top 1.016: 24.07,21.2 24.09,21.2 | RFC2254.1 24.07,21.2 | U2252.5 22.5,21.2 24.07,21.2
  Top 1.27: RFC2254.1 24.07,19.17 24.09,19.17 | C2275.1 24.22,17.39 24.09,17.39 24.09,18.92